# Altium PCB PCB1.PcbDoc (part 1 of 9)
Units mm, origin at the board's own origin, x right, y up, seen from the top; angles counter-clockwise.
Board outline 227 x 102 mm, 4 copper layers (Top Layer, MidLayer1, MidLayer2, Bottom Layer); 425 components, 426 nets, 1455 pads, 440 vias.
Unrouted connection lines stored in the file: 2.
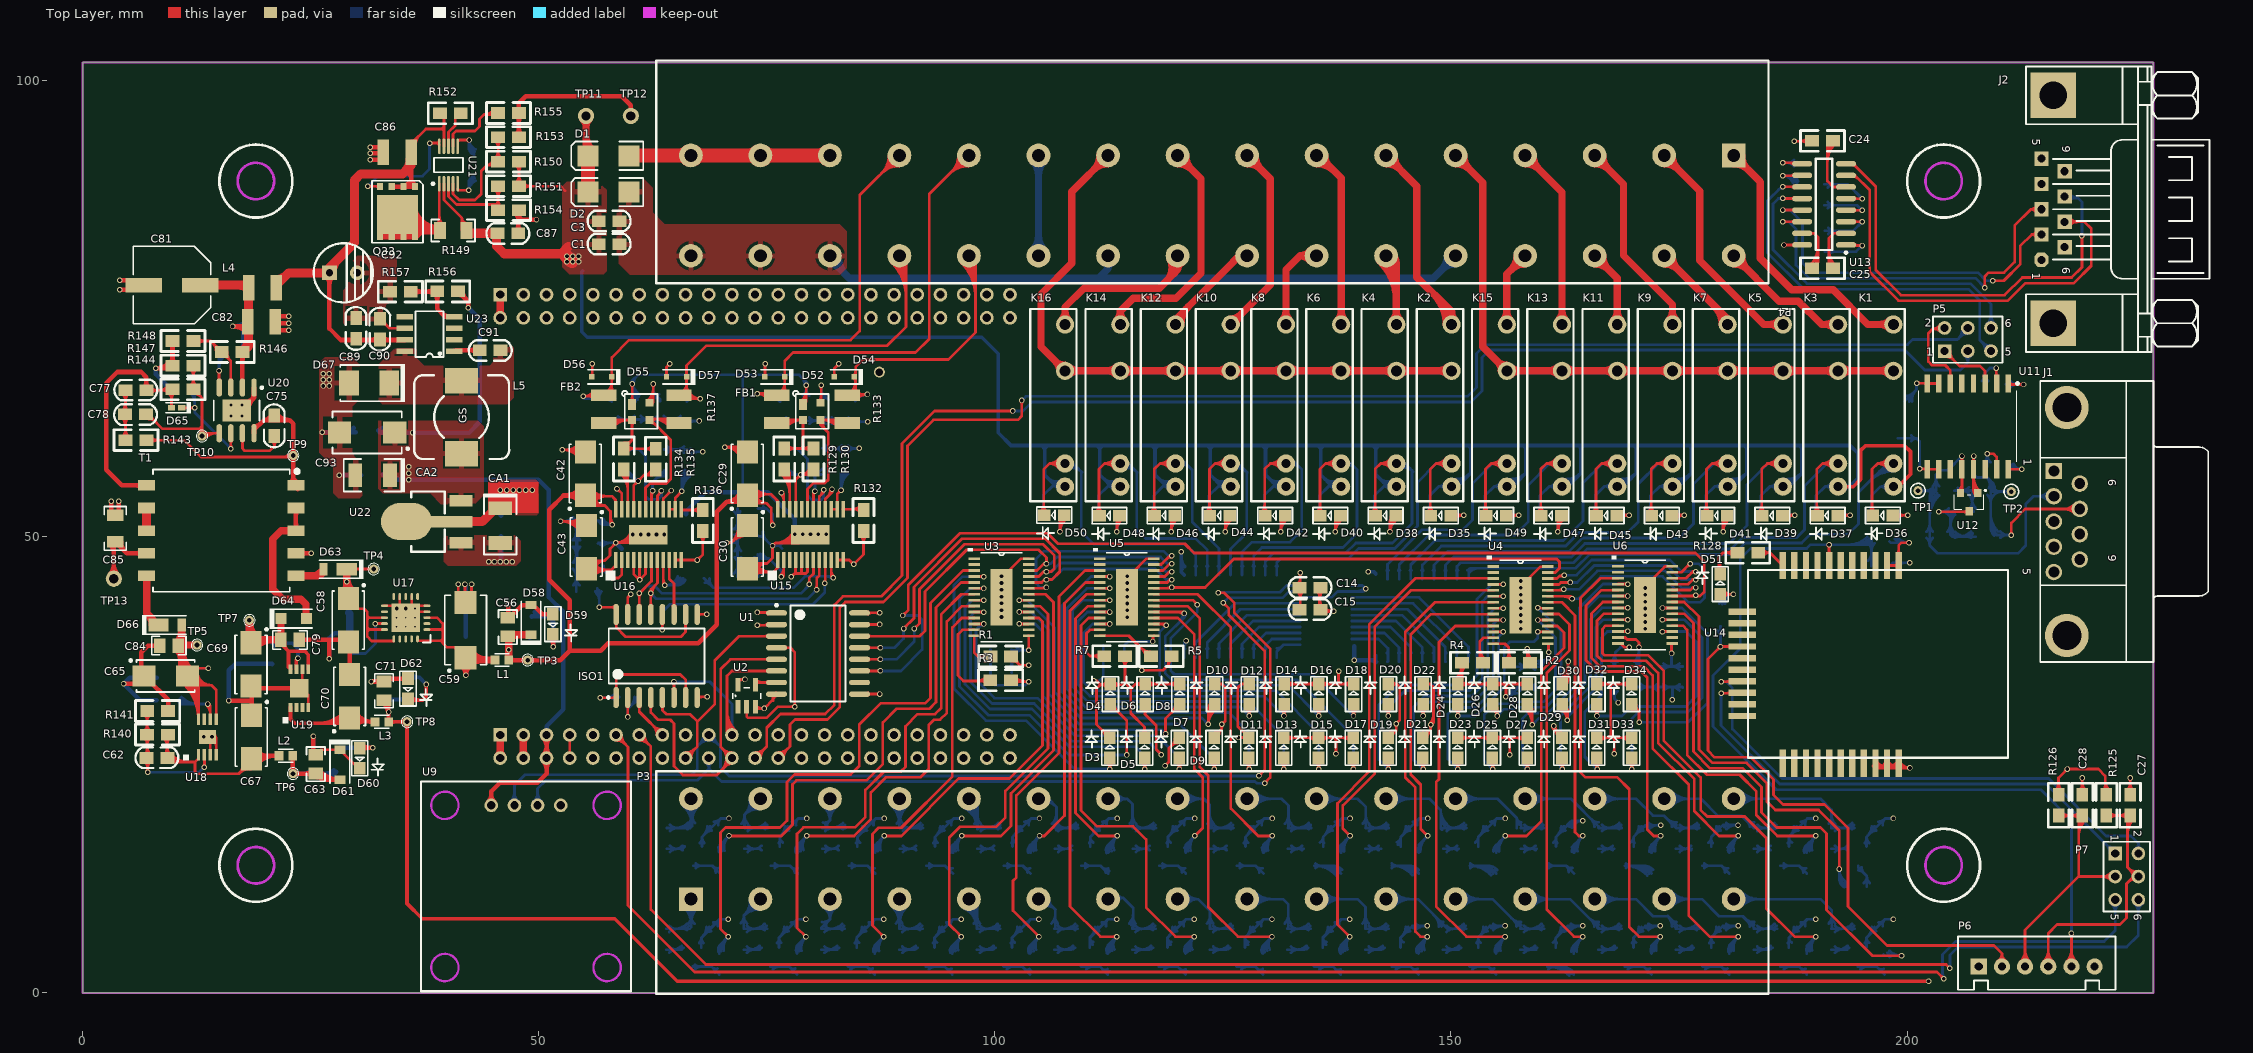
[diagram p0: Top Layer view]
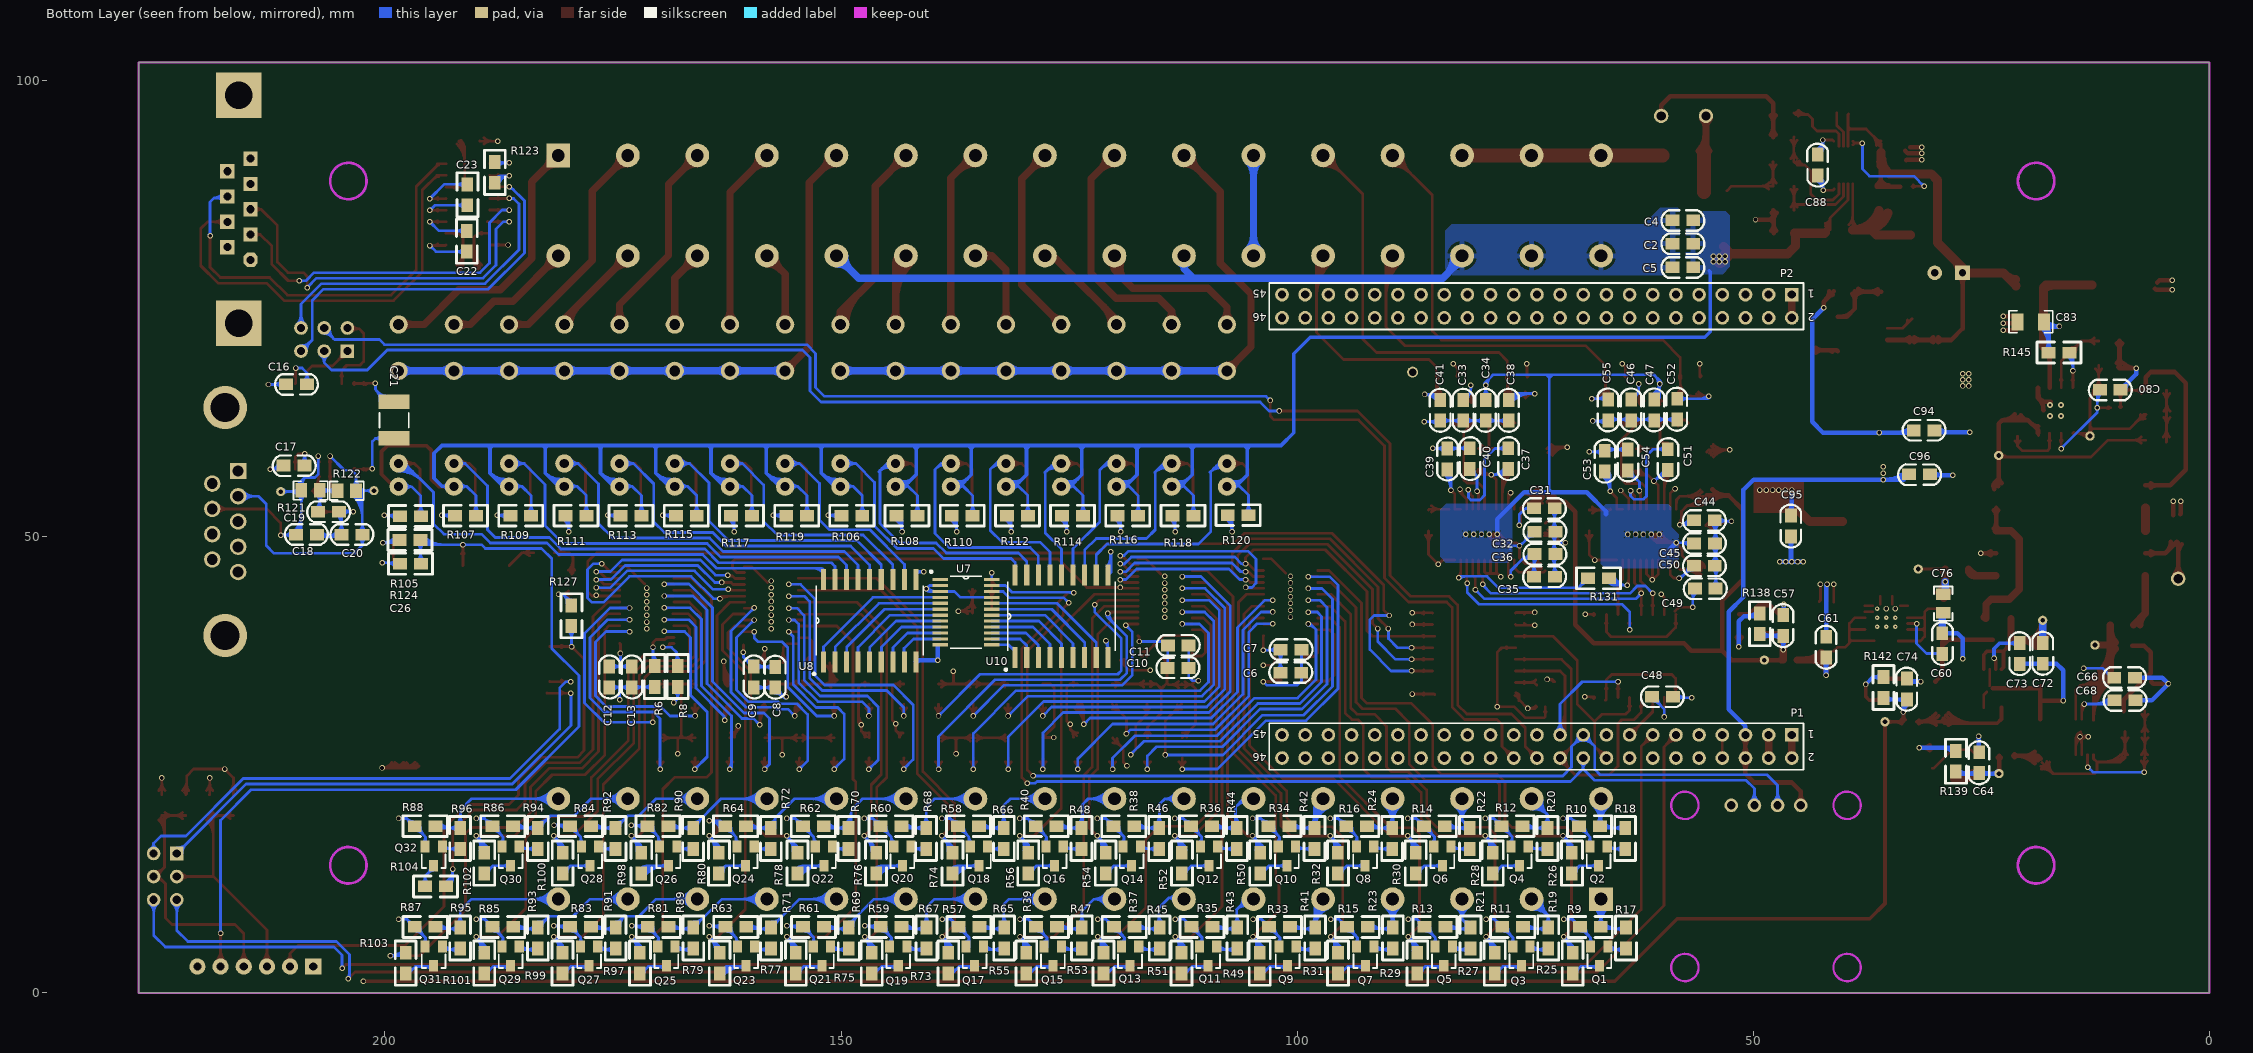
[diagram p1: Bottom Layer view, seen from below]
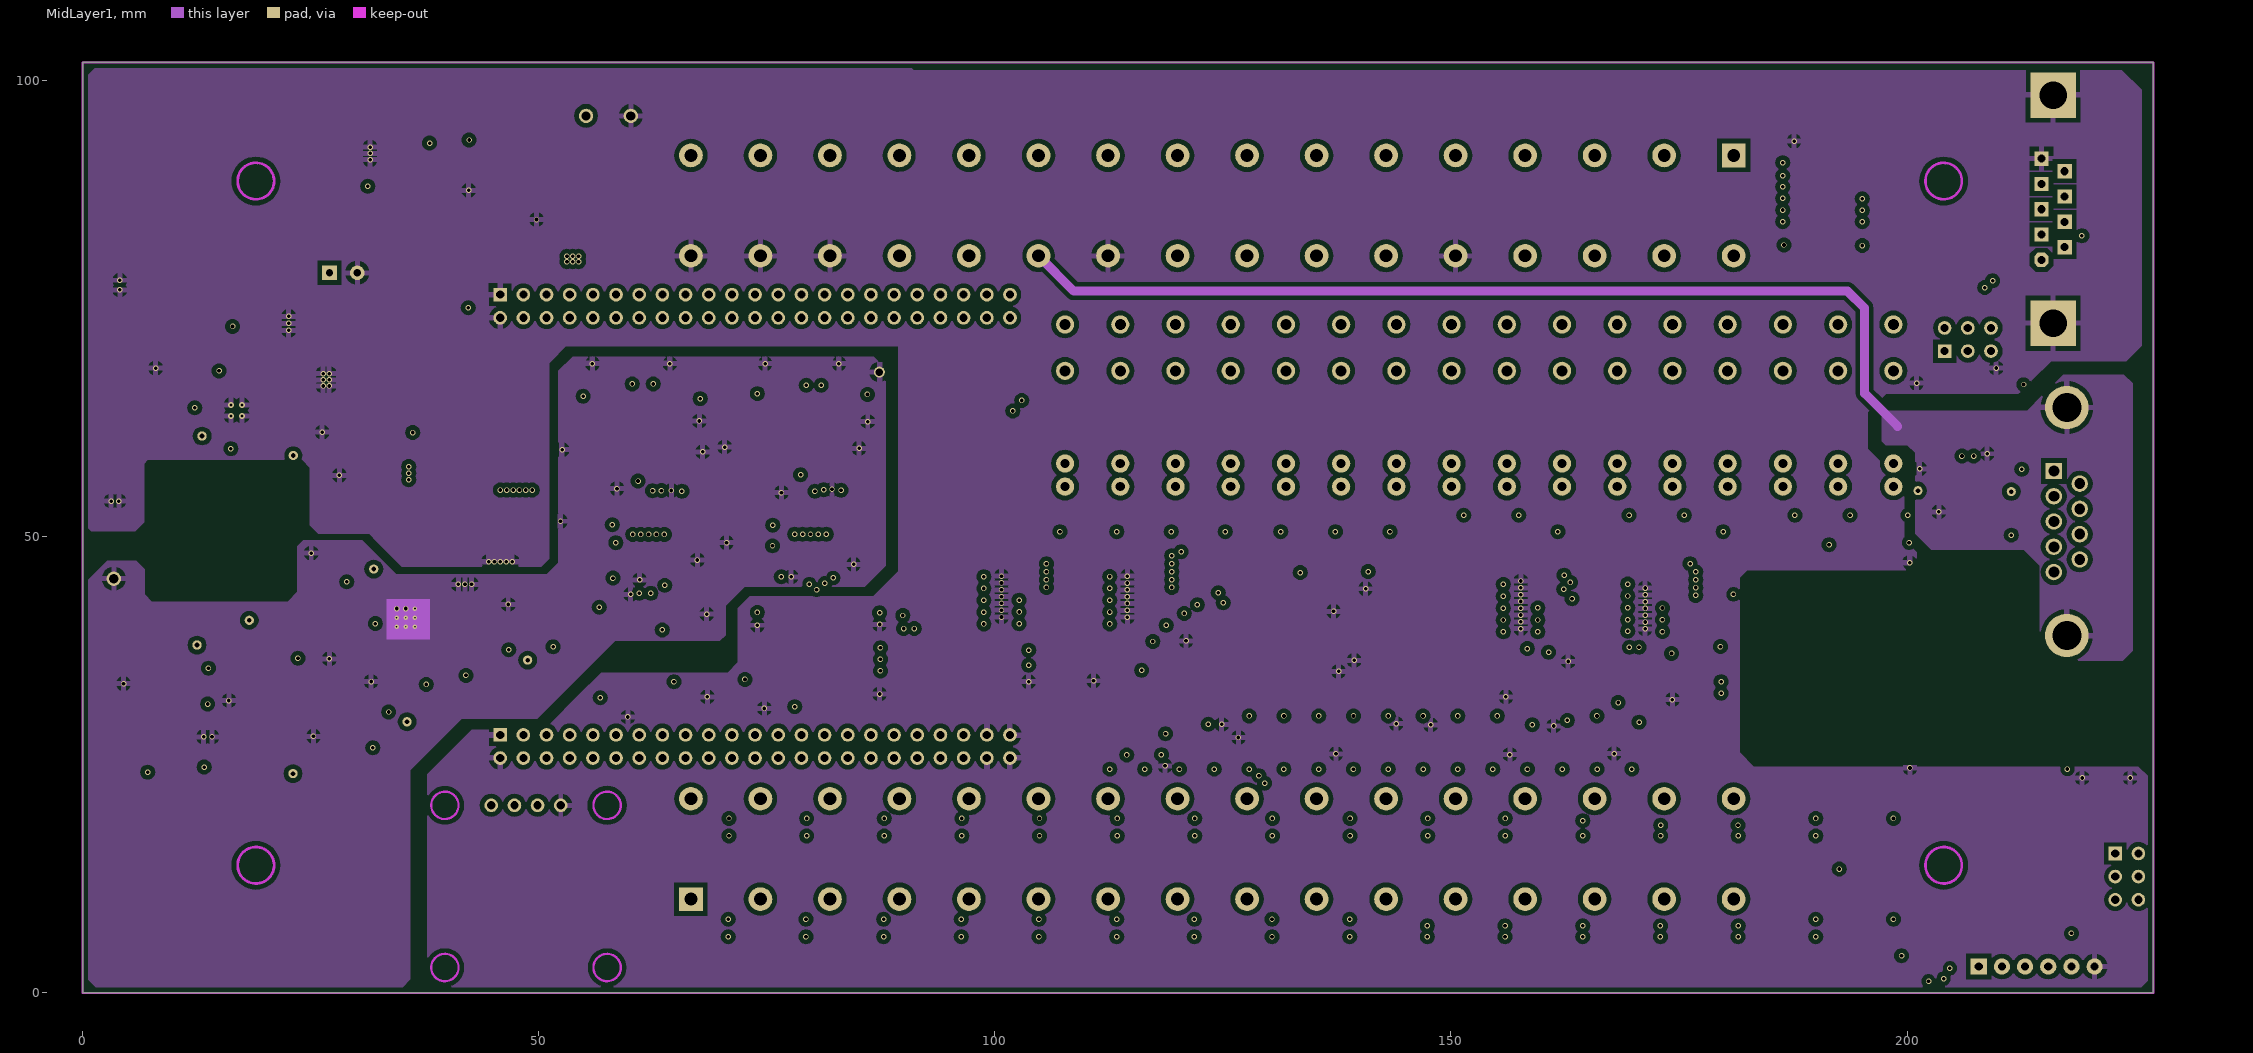
[diagram p2: MidLayer1]
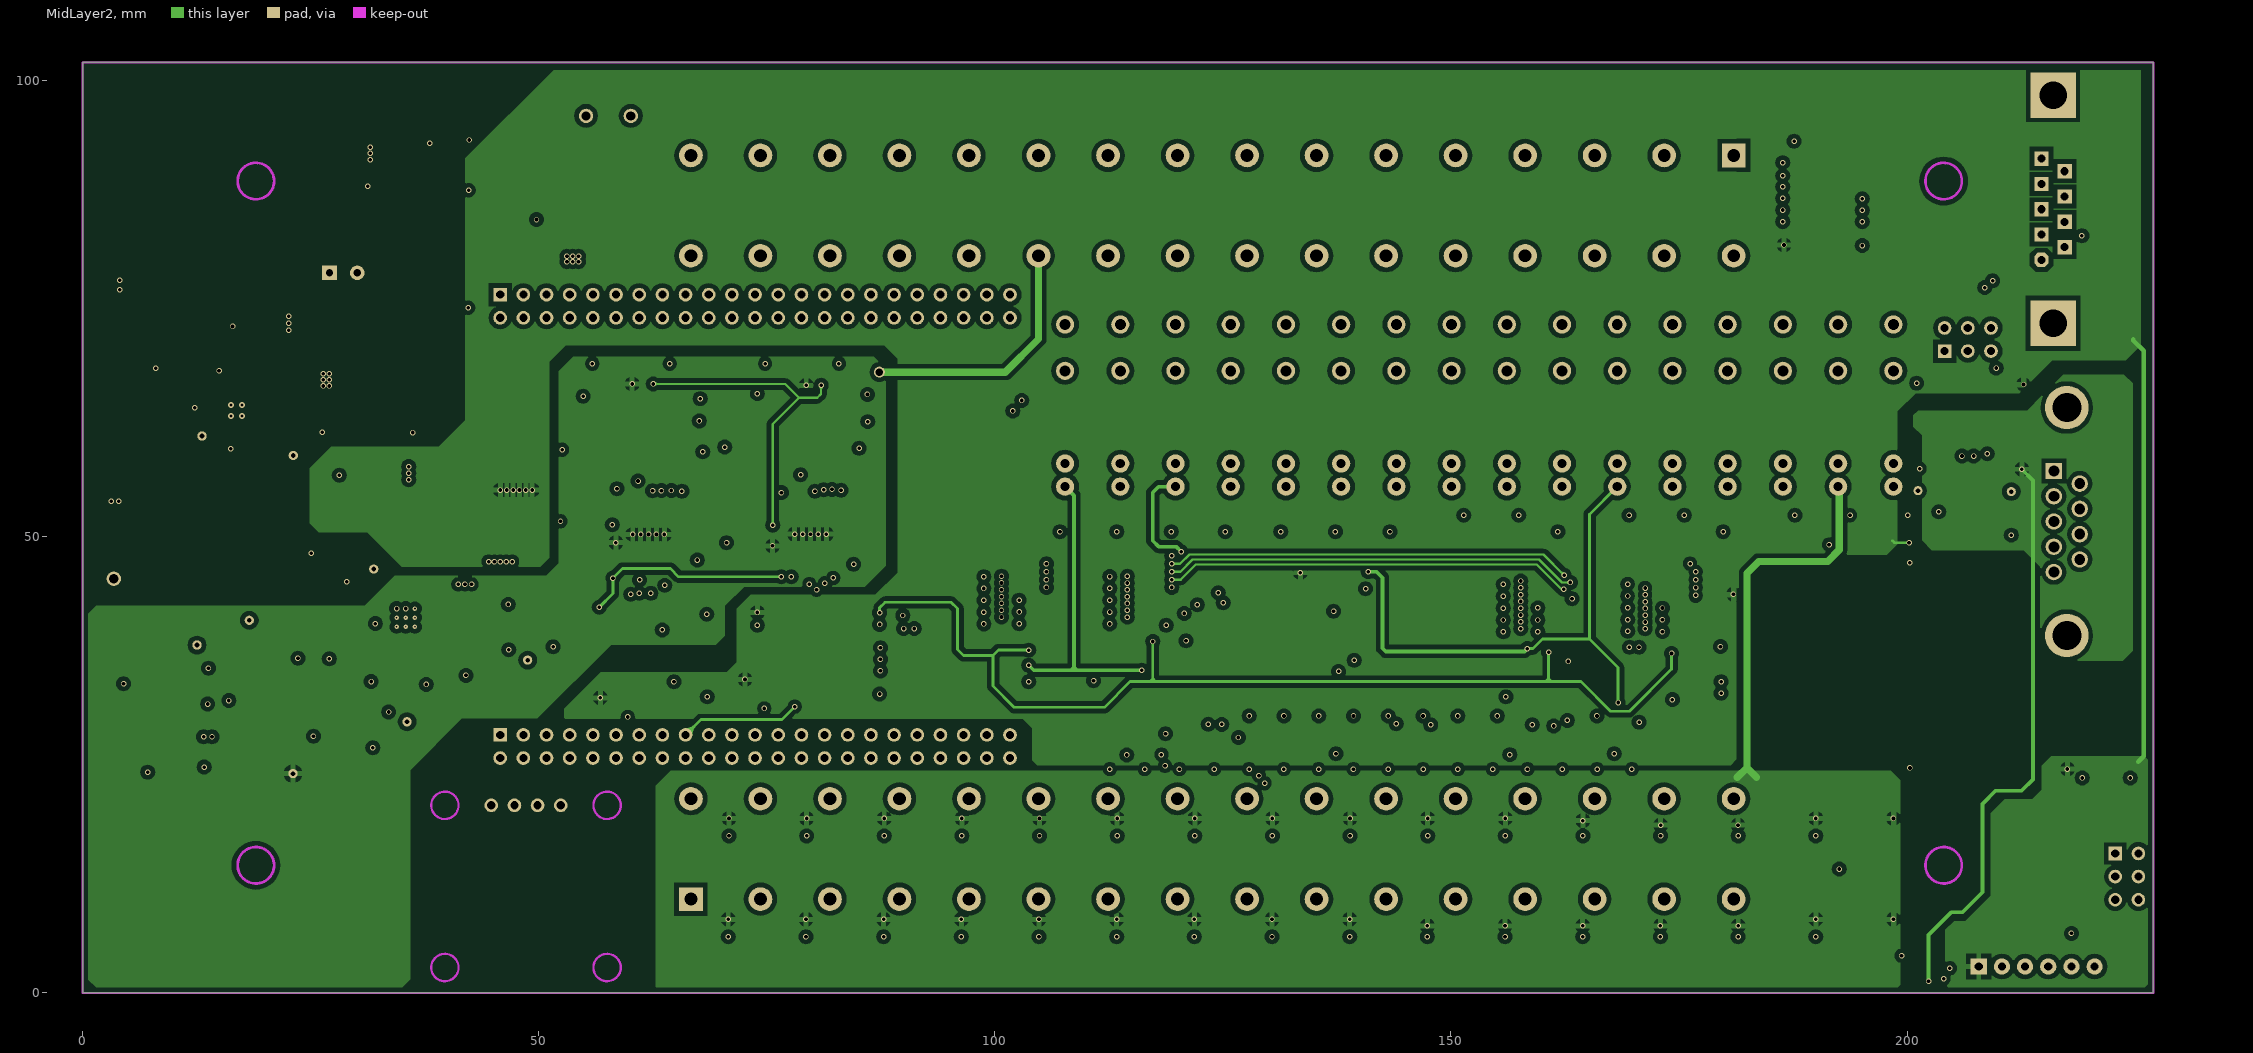
[diagram p3: MidLayer2]

## Layer stack, top to bottom
Top Layer: signal copper 0.0356
Dielectric: core 0.32, FR-4, Dk 4.8
MidLayer1: signal copper 0.0356
Dielectric: prepreg 0.32, FR-4, Dk 4.8
MidLayer2: signal copper 0.0356
Dielectric: core 0.32, FR-4, Dk 4.8
Bottom Layer: signal copper 0.0356

## Board outline
0,0 227,0 227,102 0,102

## Design rules (kind name [scope] priority, off if disabled: settings)
Clearance [All] p1: gap=0.3
ComponentClearance [All] p1: gap=0.254 collisioncheckmode=3 verticalgap=0.254
PolygonConnect [All] p1: connectstyle=Relief reliefconductorwidth=0.6 reliefentries=4 polygonreliefangle="90 Angle"
RoutingVias [All] p1: holewidth=0.711 width=1.27 viastyle="Through Hole" minholewidth=0.711 minwidth=1.27 maxholewidth=0.711 maxwidth=1.27
SolderMaskExpansion [All] p1: expansion=0.102
TestPointUsage FabricationTestPointUsage [All] p1: valid=0 allowmultiple=FALSE
Testpoint FabricationTestpoint [All] p1: side=3 testpointundercomponent=TRUE minsize=1.016 maxsize=2.54 preferedsize=1.524 minholesize=0 maxholesize=1.016 preferedholesize=0.813 testpointgrid=0.025 style=297 order=0123456789
Width [All] p1: maxlimit=2 minlimit=0.254 preferedwidth=0.254 toplayer_prefwidth=0.3 midlayer1_prefwidth=0.3 midlayer2_prefwidth=0.3 bottomlayer_prefwidth=0.3 minimp=50.000000 maximp=50.000000 favimp=50.000000
18 further rules are at their usual default settings.

## Classes and differential pairs
component class Designator: C75 C76 C77 C78 C79 C80 C81 C82 C83 C84 C85 C86 C87 C88 C89 C90 C91 C92 C93 C94 C95 C96 CA1 CA2 D63 D64 D65 D66 D67 L4 L5 Q33 R143 R144 R145 R146 R147 R148 R149 R150 R151 R152 R153 R154 R155 R156 R157 T1 TP9 TP10 TP11 TP12 TP13 TP19 U20 U21 U22 U23
component class Designator: C56 C57 C58 C59 C60 C61 C62 C63 C64 C65 C66 C67 C68 C69 C70 C71 C72 C73 C74 D58 D59 D60 D61 D62 L1 L2 L3 R138 R139 R140 R141 R142 TP3 TP4 TP5 TP6 TP7 TP8 TP16 TP21 TP28 U17 U18 U19
component class Designator: C29 C30 C31 C32 C33 C34 C35 C36 C37 C38 C39 C40 C41 C42 C43 C44 C45 C46 C47 C48 C49 C50 C51 C52 C53 C54 C55 D52 D53 D54 D55 D56 D57 FB1 FB2 FB3 H1 H2 H3 H4 ISO1 J3 J4 J5 J6 J8 R129 R130 R131 R132 R133 R134 R135 R136 R137 Rset2 U15 U16
component class Designator: P1 P2 P3 P4
component class Designator: C1 C2 C3 C4 C5 C6 C7 C8 C9 C10 C11 C12 C13 D1 D2 D3 D4 D5 D6 D7 D8 D9 D10 D11 D12 D13 D14 D15 D16 D17 D18 D19 D20 D21 D22 D23 D24 D25 D26 D27 D28 D29 D30 D31 D32 D33 D34 R1 R2 R3 R4 R5 R6 R7 R8 U1 U2 U3 U4 U5 U6
component class Designator: Q1 Q2 Q3 Q4 Q5 Q6 Q7 Q8 Q9 Q10 Q11 Q12 Q13 Q14 Q15 Q16 Q17 Q18 Q19 Q20 Q21 Q22 Q23 Q24 Q25 Q26 Q27 Q28 Q29 Q30 Q31 Q32 R9 R10 R11 R12 R13 R14 R15 R16 R17 R18 R19 R20 R21 R22 R23 R24 R25 R26 R27 R28 R29 R30 R31 R32 R33 R34 R35 R36 R37 R38 R39 R40 R41 R42 R43 R44 R45 R46 R47 R48 R49 R50 R51 R52 R53 R54 R55 R56 R57 R58 R59 R60 R61 R62 R63 R64 R65 R66 R67 R68 R69 R70 R71 R72 R73 R74 R75 R76 R77 R78 R79 R80 R81 R82 R83 R84 R85 R86 R87 R88 R89 R90 R91 R92 R93 R94 R95 R96 R97 R98 R99 R100 R101 R102 R103 R104
component class Designator: C14 C15 D35 D36 D37 D38 D39 D40 D41 D42 D43 D44 D45 D46 D47 D48 D49 D50 K1 K2 K3 K4 K5 K6 K7 K8 K9 K10 K11 K12 K13 K14 K15 K16 R105 R106 R107 R108 R109 R110 R111 R112 R113 R114 R115 R116 R117 R118 R119 R120 U7 U8 U9 U10
component class Designator: C16 C17 C18 C19 C20 C21 C22 C23 C24 C25 C26 C27 C28 D51 J1 J2 P5 P6 P7 R121 R122 R123 R124 R125 R126 R127 R128 TP1 TP2 U11 U12 U13
net class PA[0..7]: PA0 PA1 PA2 PA3 PA4 PA5 PA6 PA7
net class PB[0..7]: PB0 PB1 PB2 PB3 PB4 PB5 PB6 PB7

## Components (designator, comment, footprint, x,y, rotation, side; value= is the part's Value field where it differs from the comment)
C1 "Cap" 0805_cap 58.56,81.95 r180 top
C2 "Cap" 0805_cap 58.56,82.26 r180 bottom
C3 "Cap" 0805_cap 58.56,84.48 r180 top
C4 "Cap" 0805_cap 58.56,84.8 r180 bottom
C5 "Cap" 0805_cap 58.56,79.66 r180 bottom
C6 "Cap" 0805_cap 99.86,35.01 r0 bottom
C7 "Cap" 0805_cap 99.83,37.52 r0 bottom
C8 "Cap" 0805_cap 157.337,33.777 r90 bottom
C9 "Cap" 0805_cap 159.66,33.8 r90 bottom
C10 "Cap" 0805_cap 112.234,35.51 r0 bottom
C11 "Cap" 0805_cap 112.204,37.98 r0 bottom
C12 "Cap" 0805_cap 175.507,33.8 r90 bottom
C13 "Cap" 0805_cap 173.057,33.8 r90 bottom
C14 "Cap" 0805_cap 135.39,44.31 r180 top
C15 "Cap" 0805_cap 135.39,41.91 r180 top
C16 "C1005X7R1C103K" 0805_cap 210.53,66.85 r180 bottom
C17 "C1005X7R1C103K" 0805_cap 210.78,57.93 r180 bottom
C18 "06035A680JAT2A" 0805_cap 207.77,50.13 r0 bottom
C19 "C1608C0G1E472J" 0805_cap 207,52.88 r180 bottom
C20 "06035A680JAT2A" 0805_cap 202.78,50.12 r0 bottom
C21 "1812GC102KA1" 1812 198.99,62.8 r90 bottom
C22 "0.1uF" C0805 191.01,83.8 r90 bottom
C23 "0.1uF" C0805 190.95,88.89 r90 bottom
C24 "0.1uF" C0805 192.134,93.4 r0 top
C25 "0.1uF" C0805 189.34,79.44 r180 top
C26 "0.1uF" C0805 195.8,47.05 r180 bottom
C27 "101" C0805 224.45,19.19 r270 top
C28 "101" C0805 219.217,19.19 r270 top
C29 "293D475X9035C2TE3" 6032-28 72.87,56.93 r90 top
C30 "293D475X9035C2TE3" 6032-28 72.88,48.881 r270 top
C31 "GRM188R71H104KA93D" 0805_cap 73.74,53.23 r180 bottom
C32 "GRM188R71H104KA93D" 0805_cap 72,50.46 r0 bottom
C33 "GRM188R71H104KA93D" 0805_cap 81.67,64.71 r270 bottom
C34 "GRM188R71H104KA93D" 0805_cap 79.21,64.71 r270 bottom
C35 "GRM188R71H104KA93D" 0805_cap 73.72,45.75 r180 bottom
C36 "GRM188R71H104KA93D" 0805_cap 73.68,48.228 r180 bottom
C37 "GRM1885C1H222JA01D" 0805_cap 76.97,57.74 r90 bottom
C38 "06035C104KAT2A" 0805_cap 76.69,64.71 r270 bottom
C39 "06035C104KAT2A" 0805_cap 83.67,57.69 r90 bottom
C40 "C1608X7R1H223K" 0805_cap 81.18,57.74 r90 bottom
C41 "06035C104KAT2A" 0805_cap 84.19,64.71 r270 bottom
C42 "293D475X9035C2TE3" 6032-28 55.11,56.93 r90 top
C43 "293D475X9035C2TE3" 6032-28 55.22,48.881 r270 top
C44 "GRM188R71H104KA93D" 0805_cap 56.2,51.91 r180 bottom
C45 "GRM188R71H104KA93D" 0805_cap 54.52,49.16 r0 bottom
C46 "GRM188R71H104KA93D" 0805_cap 63.265,64.75 r270 bottom
C47 "GRM188R71H104KA93D" 0805_cap 60.74,64.75 r270 bottom
C48 "GRM188R71H104KA93D" 0805_cap 59.13,32.34 r0 bottom
C49 "GRM188R71H104KA93D" 0805_cap 56.1,44.45 r180 bottom
C50 "GRM188R71H104KA93D" 0805_cap 56.2,46.95 r180 bottom
C51 "GRM1885C1H222JA01D" 0805_cap 59.48,57.63 r90 bottom
C52 "06035C104KAT2A" 0805_cap 58.25,64.83 r270 bottom
C53 "06035C104KAT2A" 0805_cap 66.39,57.46 r90 bottom
C54 "C1608X7R1H223K" 0805_cap 63.88,57.59 r90 bottom
C55 "06035C104KAT2A" 0805_cap 65.79,64.75 r270 bottom
C56 "C2012X5R1H475K125AB" 0805_HV 46.61,40.1 r90 top
C57 "06035C104KAT2A" 0805_cap 46.61,41.116 r270 bottom
C58 "293D475X9035C2TE3" 6032-28 29.13,40.86 r270 top
C59 "293D226X9035D2TE3" 7343-31 41.985,39.78 r90 top
C60 "C1608X7R1E105K080AB" 0805_cap 29.39,37.46 r90 bottom
C61 "06035C104KAT2A" 0805_cap 41.9,38.74 r270 bottom
C62 "06031C103JAT2A" 0805_cap 8.99,25.65 r180 top
C63 "C2012X5R1H475K125AB" 0805_HV 25.565,25.08 r270 top
C64 "06035C104KAT2A" 0805_cap 25.13,26.08 r270 bottom
C65 "293D106X9035C2TE3" 6032-28 9.12,34.745 r0 top
C66 "06035C104KAT2A" 0805_cap 8.46,34.45 r0 bottom
C67 "293D106X9035C2TE3" 6032-28 18.51,28.06 r270 top
C68 "06031C103JAT2A" 0805_cap 10.08,32.2 r180 bottom
C69 "293D106X9035C2TE3" 6032-28 18.465,36.02 r270 top
C70 "293D106X9035C2TE3" 6032-28 29.27,32.526 r90 top
C71 "C2012X5R1H475K125AB" 0805_HV 33.04,33.126 r90 top
C72 "06035C104KAT2A" 0805_cap 18.4,36.4 r90 bottom
C73 "06031C102JAT2A" 0805_cap 20.67,38.04 r270 bottom
C74 "06035C104KAT2A" 0805_cap 33.04,34.142 r270 bottom
C75 "06031C103JAT2A" 0805_cap 21.14,63.01 r270 top
C76 "GRM219R61E225KA12D" 0805_HV 29.18,42.68 r270 bottom
C77 "06031C103JAT2A" 0805_cap 6.68,65.95 r180 top
C78 "06031C102JAT2A" 0805_CAP 4.97,63.53 r0 top
C79 "GRM219R61E225KA12D" 0805_HV 22.75,38.71 r0 top
C80 "C1608X7R1E105K080AB" 0805_cap 11.71,66.24 r180 bottom
C81 "EEE-FK1H220P" SM_RADIAL_E 9.79,77.59 r180 top
C82 "GRM32ER72A225KA35L" 1210 19.62,73.583 r180 top
C83 "C3216X7R2A474K" 1206 19.58,73.57 r0 bottom
C84 "GRM219R61E225KA12D" 0805_HV 9.46,38.08 r0 top
C85 "202R18W102KV4E" 1206 3.58,50.92 r270 top
C86 "GRM32ER72A225KA35L" 1210 34.49,92.14 r0 top
C87 "06031C102JAT2A" 0805_cap 45.784,83.39 r0 top
C88 "UMK107ABJ474KA-T" 0805_cap 42.814,91.59 r270 bottom
C89 "4.7μF/10%/0805" 0805_CAP 30.11,73.686 r270 top
C90 "4.7μF/10%/0805" 0805_CAP 32.72,73.596 r270 top
C91 "0.01μF/10%/0805" 0805_CAP 43.85,70.57 r0 top
C92 "220μF" CZ3.0/6.5 28.59,78.94 r180 top
C93 "476C" 7343-43 31.2,61.44 r180 top
C94 "0.1μf/10%/0805" 0805_CAP 30.44,61.55 r0 bottom
C95 "0.1uF" 0805_CAP 45.76,52.02 r270 bottom
C96 "0.1uF" 0805_CAP 32.62,56.95 r180 bottom
CA1 "4.7UF/16V" 3528cap 45.76,53.11 r270 top
CA2 "10UF/16V" 3528cap 33.68,56.78 r180 top
D1 "B540C-13-F" SMB#1 57.66,91.77 r180 top
D2 "SMCJ26CA" SMB#1 57.66,87.79 r180 top
D3 "LED3" 0805LED 112.614,26.903 r90 top
D4 "LED3" 0805LED 112.673,32.803 r90 top
D5 "LED3" 0805LED 116.427,26.903 r90 top
D6 "LED3" 0805LED 116.482,32.803 r90 top
D7 "LED3" 0805LED 120.24,26.903 r90 top
D8 "LED3" 0805LED 120.291,32.803 r90 top
D9 "LED3" 0805LED 124.052,26.903 r90 top
D10 "LED3" 0805LED 124.1,32.803 r90 top
D11 "LED3" 0805LED 127.865,26.903 r90 top
D12 "LED3" 0805LED 127.91,32.803 r90 top
D13 "LED3" 0805LED 131.678,26.903 r90 top
D14 "LED3" 0805LED 131.719,32.803 r90 top
D15 "LED3" 0805LED 135.491,26.903 r90 top
D16 "LED3" 0805LED 135.528,32.803 r90 top
D17 "LED3" 0805LED 139.304,26.903 r90 top
D18 "LED3" 0805LED 139.337,32.803 r90 top
D19 "LED3" 0805LED 143.116,26.903 r90 top
D20 "LED3" 0805LED 143.146,32.803 r90 top
D21 "LED3" 0805LED 146.929,26.903 r90 top
D22 "LED3" 0805LED 146.955,32.803 r90 top
D23 "LED3" 0805LED 150.742,26.903 r90 top
D24 "LED3" 0805LED 150.765,32.803 r90 top
D25 "LED3" 0805LED 154.555,26.903 r90 top
D26 "LED3" 0805LED 154.574,32.803 r90 top
D27 "LED3" 0805LED 158.368,26.903 r90 top
D28 "LED3" 0805LED 158.383,32.803 r90 top
D29 "LED3" 0805LED 162.181,26.903 r90 top
D30 "LED3" 0805LED 162.192,32.803 r90 top
D31 "LED3" 0805LED 165.993,26.903 r90 top
D32 "LED3" 0805LED 166.001,32.803 r90 top
D33 "LED3" 0805LED 169.806,26.903 r90 top
D34 "LED3" 0805LED 169.81,32.803 r90 top
D35 "LED3" 0805LED 148.857,52.34 r180 top
D36 "LED3" 0805LED 197.3,52.35 r180 top
D37 "LED3" 0805LED 191.245,52.34 r180 top
D38 "LED3" 0805LED 142.802,52.34 r180 top
D39 "LED3" 0805LED 185.189,52.34 r180 top
D40 "LED3" 0805LED 136.747,52.34 r180 top
D41 "LED3" 0805LED 179.134,52.34 r180 top
D42 "LED3" 0805LED 130.691,52.34 r180 top
D43 "LED3" 0805LED 173.079,52.34 r180 top
D44 "LED3" 0805LED 124.636,52.34 r180 top
D45 "LED3" 0805LED 167.023,52.34 r180 top
D46 "LED3" 0805LED 118.581,52.34 r180 top
D47 "LED3" 0805LED 160.968,52.34 r180 top
D48 "LED3" 0805LED 112.525,52.34 r180 top
D49 "LED3" 0805LED 154.913,52.34 r180 top
D50 "LED3" 0805LED 106.47,52.39 r180 top
D51 "VDD33" 0805LED 179.53,44.86 r90 top
D52 "CD143A-SR70" SOT-143 78.98,64.7 r0 top
D53 "CDSOD323-T15SC" sod-323 75.87,67.53 r180 top
D54 "CDSOD323-T15SC" sod-323 83.51,67.53 r180 top
D55 "CD143A-SR70" SOT-143 60.24,64.7 r0 top
D56 "CDSOD323-T15SC" sod-323 56.92,67.53 r180 top
D57 "CDSOD323-T15SC" sod-323 65.11,67.53 r180 top
D58 "DZ2W18000L" SOD-123 49.16,40.9 r90 top
D59 "LED_LG L29K-G2J1-24-Z" 0805LED 51.54,40.39 r270 top
D60 "DZ2W18000L" SOD-123 28.21,25.02 r270 top
D61 "LED_LG L29K-G2J1-24-Z" 0805LED 30.37,25.69 r270 top
D62 "LED_LG L29K-G2J1-24-Z" 0805LED 35.66,33.32 r270 top
D63 "DFLS1200-7" powerDI123 27.69,46.45 r180 top
D64 "PMEG6010CEH,115" SOD-123F 23.15,41.04 r0 top
D65 "SDM10U45-7-F" SOD-523 10.31,64.15 r180 top
D66 "DFLS1200-7" powerDI123 9.6,40.33 r0 top
D67 "SMB" SMB#2 31.42,66.84 r180 top
FB1 "MH3261-501Y" 1210 76.11,64 r270 top
FB2 "MH3261-501Y" 1210 57.12,64 r270 top
ISO1 "ISO7641FCDW" M16B_N 62.93,36.94 r90 top locked
J1 "1734348-1" CONN_1734348-1 227,51.68 r270 top locked
J2 "UART-male" "UART - Male" 220.04,85.91 r270 top locked
K1 "Relay-SPST" PA1a-24v 194.67,53.89 r90 top
K2 "Relay-SPST" PA1a-24v 146.249,53.89 r90 top
K3 "Relay-SPST" PA1a-24v 188.617,53.89 r90 top
K4 "Relay-SPST" PA1a-24v 140.196,53.89 r90 top
K5 "Relay-SPST" PA1a-24v 182.565,53.89 r90 top
K6 "Relay-SPST" PA1a-24v 134.143,53.89 r90 top
K7 "Relay-SPST" PA1a-24v 176.512,53.89 r90 top
K8 "Relay-SPST" PA1a-24v 128.091,53.89 r90 top
K9 "Relay-SPST" PA1a-24v 170.459,53.89 r90 top
K10 "Relay-SPST" PA1a-24v 122.038,53.89 r90 top
K11 "Relay-SPST" PA1a-24v 164.407,53.89 r90 top
K12 "Relay-SPST" PA1a-24v 115.985,53.89 r90 top
K13 "Relay-SPST" PA1a-24v 158.354,53.89 r90 top
K14 "Relay-SPST" PA1a-24v 109.933,53.89 r90 top
K15 "Relay-SPST" PA1a-24v 152.301,53.89 r90 top
K16 "Relay-SPST" PA1a-24v 103.88,53.89 r90 top
L1 "1000 OHM" FB0603 45.97,36.5 r0 top
L2 "1000 OHM" FB0603 22.28,26 r0 top
L3 "1000 OHM" FB0603 32.8,29.716 r0 top
L4 "3.3uH" 1210 19.73,77.3 r0 top
L5 "15μH" GSDS104C2 41.55,63.13 r0 top
P1 "Header 23X2" HDR2X23 45.78,28.29 r0 bottom locked
P2 "Header 23X2" HDR2X23 45.78,76.55 r0 bottom locked
P3 "Header 16X2" 123 66.687,10.29 r90 top locked
P4 "Header 16X2" 123 180.987,91.81 r270 top locked
P5 "Header 3X2" HDR2X3 204.11,70.36 r0 top
P6 "ISP" SIP-6B 207.85,2.9 r0 top
P7 "Header 3X2" HDR2X3 222.81,15.3 r270 top
Q1 "8550" Sot23-3 65.93,5.087 r0 bottom
Q2 "8550" Sot23-3 66.01,16.047 r0 bottom
Q3 "8550" Sot23-3 74.47,5.087 r0 bottom
Q4 "8550" Sot23-3 74.67,16.047 r0 bottom
Q5 "8550" Sot23-3 82.98,5.087 r0 bottom
Q6 "8550" Sot23-3 83.13,16.047 r0 bottom
Q7 "8550" Sot23-3 91.58,5.087 r0 bottom
Q8 "8550" Sot23-3 91.6,16.047 r0 bottom
Q9 "8550" Sot23-3 100.1,5.087 r0 bottom
Q10 "8550" Sot23-3 100.18,16.047 r0 bottom
Q11 "8550" Sot23-3 108.81,5.087 r0 bottom
Q12 "8550" Sot23-3 108.7,16.047 r0 bottom
Q13 "8550" Sot23-3 117.37,5.087 r0 bottom
Q14 "8550" Sot23-3 117.19,16.047 r0 bottom
Q15 "8550" Sot23-3 125.83,5.087 r0 bottom
Q16 "8550" Sot23-3 125.64,16.047 r0 bottom
Q17 "8550" Sot23-3 134.4,5.087 r0 bottom
Q18 "8550" Sot23-3 133.94,16.047 r0 bottom
Q19 "8550" Sot23-3 142.78,5.087 r0 bottom
Q20 "8550" Sot23-3 142.32,16.047 r0 bottom
Q21 "8550" Sot23-3 151.15,5.087 r0 bottom
Q22 "8550" Sot23-3 150.92,16.047 r0 bottom
Q23 "8550" Sot23-3 159.46,5.087 r0 bottom
Q24 "8550" Sot23-3 159.51,16.047 r0 bottom
Q25 "8550" Sot23-3 168.19,5.087 r0 bottom
Q26 "8550" Sot23-3 167.98,16.047 r0 bottom
Q27 "8550" Sot23-3 176.66,5.087 r0 bottom
Q28 "8550" Sot23-3 176.56,16.047 r0 bottom
Q29 "8550" Sot23-3 185.27,5.087 r0 bottom
Q30 "8550" Sot23-3 185.27,16.047 r0 bottom
Q31 "8550" Sot23-3 193.7,5.087 r0 bottom
Q32 "8550" Sot23-3 193.7,16.047 r0 bottom
Q33 "CSD18537NQ5A" TRANS_NexFET_Q5A 34.53,85.62 r270 top
R1 "Res1" 0805 101.79,36.88 r180 top
R2 "Res1" 0805 158.65,36.2 r180 top
R3 "Res1" 0805 101.78,34.28 r180 top
R4 "Res1" 0805 151.23,36.2 r0 top
R5 "Res1" 0805 119.39,36.93 r180 top
R6 "Res1" 0805 167.9,33.551 r90 bottom
R7 "Res1" 0805 114.28,36.92 r180 top
R8 "Res1" 0805 170.431,33.551 r90 bottom
R9 "Res1" 0805 69.01,7.24 r180 bottom
R10 "Res1" 0805 69.09,18.29 r180 bottom
R11 "Res1" 0805 77.525,7.24 r180 bottom
R12 "Res1" 0805 77.599,18.29 r180 bottom
R13 "Res1" 0805 86.039,7.24 r180 bottom
R14 "Res1" 0805 86.109,18.29 r180 bottom
R15 "Res1" 0805 94.554,7.24 r180 bottom
R16 "Res1" 0805 94.618,18.29 r180 bottom
R17 "Res1" 0805 63.96,7.16 r270 bottom
R18 "Res1" 0805 64.05,18.09 r270 bottom
R19 "Res1" 0805 72.479,7.16 r270 bottom
R20 "Res1" 0805 72.563,18.09 r270 bottom
R21 "Res1" 0805 80.999,7.16 r270 bottom
R22 "Res1" 0805 81.077,18.09 r270 bottom
R23 "Res1" 0805 89.518,7.16 r270 bottom
R24 "Res1" 0805 89.59,18.09 r270 bottom
R25 "Res1" 0805 69.8,2.13 r90 bottom
R26 "Res1" 0805 69.88,13.09 r90 bottom
R27 "Res1" 0805 78.34,2.13 r90 bottom
R28 "Res1" 0805 78.56,13.09 r90 bottom
R29 "Res1" 0805 86.82,2.13 r90 bottom
R30 "Res1" 0805 87,13.09 r90 bottom
R31 "Res1" 0805 95.52,2.13 r90 bottom
R32 "Res1" 0805 95.53,13.09 r90 bottom
R33 "Res1" 0805 103.069,7.24 r180 bottom
R34 "Res1" 0805 103.127,18.29 r180 bottom
R35 "Res1" 0805 111.583,7.24 r180 bottom
R36 "Res1" 0805 111.637,18.29 r180 bottom
R37 "Res1" 0805 120.098,7.24 r180 bottom
R38 "Res1" 0805 120.146,18.29 r180 bottom
R39 "Res1" 0805 128.613,7.24 r180 bottom
R40 "Res1" 0805 128.655,18.29 r180 bottom
R41 "Res1" 0805 98.037,7.16 r270 bottom
R42 "Res1" 0805 98.103,18.09 r270 bottom
R43 "Res1" 0805 106.557,7.16 r270 bottom
R44 "Res1" 0805 106.617,18.09 r270 bottom
R45 "Res1" 0805 115.076,7.16 r270 bottom
R46 "Res1" 0805 115.13,18.09 r270 bottom
R47 "Res1" 0805 123.595,7.16 r270 bottom
R48 "Res1" 0805 123.643,18.09 r270 bottom
R49 "Res1" 0805 104.1,2.13 r90 bottom
R50 "Res1" 0805 104.06,13.09 r90 bottom
R51 "Res1" 0805 112.68,2.13 r90 bottom
R52 "Res1" 0805 112.63,13.09 r90 bottom
R53 "Res1" 0805 121.23,2.13 r90 bottom
R54 "Res1" 0805 121,13.09 r90 bottom
R55 "Res1" 0805 129.69,2.13 r90 bottom
R56 "Res1" 0805 129.48,13.09 r90 bottom
R57 "Res1" 0805 137.127,7.24 r180 bottom
R58 "Res1" 0805 137.165,18.29 r180 bottom
R59 "Res1" 0805 145.642,7.24 r180 bottom
R60 "Res1" 0805 145.674,18.29 r180 bottom
R61 "Res1" 0805 154.157,7.24 r180 bottom
R62 "Res1" 0805 154.183,18.29 r180 bottom
R63 "Res1" 0805 162.671,7.24 r180 bottom
R64 "Res1" 0805 162.693,18.29 r180 bottom
R65 "Res1" 0805 132.115,7.16 r270 bottom
R66 "Res1" 0805 132.157,18.09 r270 bottom
R67 "Res1" 0805 140.634,7.16 r270 bottom
R68 "Res1" 0805 140.67,18.09 r270 bottom
R69 "Res1" 0805 149.153,7.16 r270 bottom
R70 "Res1" 0805 149.183,18.09 r270 bottom
R71 "Res1" 0805 157.673,7.16 r270 bottom
R72 "Res1" 0805 157.697,18.09 r270 bottom
R73 "Res1" 0805 138.23,2.13 r90 bottom
R74 "Res1" 0805 137.78,13.09 r90 bottom
R75 "Res1" 0805 146.63,2.13 r90 bottom
R76 "Res1" 0805 146.16,13.09 r90 bottom
R77 "Res1" 0805 154.95,2.13 r90 bottom
R78 "Res1" 0805 154.77,13.09 r90 bottom
R79 "Res1" 0805 163.3,2.13 r90 bottom
R80 "Res1" 0805 163.38,13.09 r90 bottom
R81 "Res1" 0805 171.186,7.24 r180 bottom
R82 "Res1" 0805 171.202,18.29 r180 bottom
R83 "Res1" 0805 179.701,7.24 r180 bottom
R84 "Res1" 0805 179.711,18.29 r180 bottom
R85 "Res1" 0805 188.215,7.24 r180 bottom
R86 "Res1" 0805 188.221,18.29 r180 bottom
R87 "Res1" 0805 196.73,7.24 r180 bottom
R88 "Res1" 0805 196.73,18.29 r180 bottom
R89 "Res1" 0805 166.192,7.16 r270 bottom
R90 "Res1" 0805 166.21,18.09 r270 bottom
R91 "Res1" 0805 174.711,7.16 r270 bottom
R92 "Res1" 0805 174.723,18.09 r270 bottom
R93 "Res1" 0805 183.231,7.16 r270 bottom
R94 "Res1" 0805 183.237,18.09 r270 bottom
R95 "Res1" 0805 191.75,7.16 r270 bottom
R96 "Res1" 0805 191.75,18.09 r270 bottom
R97 "Res1" 0805 172.04,2.13 r90 bottom
R98 "Res1" 0805 171.88,13.09 r90 bottom
R99 "Res1" 0805 180.53,2.13 r90 bottom
R100 "Res1" 0805 180.51,13.09 r90 bottom
R101 "Res1" 0805 189.11,2.13 r90 bottom
R102 "Res1" 0805 189.11,13.09 r90 bottom
R103 "Res1" 0805 197.72,2.13 r90 bottom
R104 "Res1" 0805 195.58,11.68 r180 bottom
R105 "Res3" 0805 196.06,52.28 r0 bottom
R106 "Res3" 0805 147.669,52.327 r0 bottom
R107 "Res3" 0805 190.011,52.327 r0 bottom
R108 "Res3" 0805 141.62,52.327 r0 bottom
R109 "Res3" 0805 183.962,52.327 r0 bottom
R110 "Res3" 0805 137.857,52.327 r180 bottom
R111 "Res3" 0805 177.913,52.327 r0 bottom
R112 "Res3" 0805 131.809,52.327 r180 bottom
R113 "Res3" 0805 171.865,52.327 r0 bottom
R114 "Res3" 0805 125.76,52.327 r180 bottom
R115 "Res3" 0805 165.816,52.327 r0 bottom
R116 "Res3" 0805 119.711,52.327 r180 bottom
R117 "Res3" 0805 159.767,52.327 r0 bottom
R118 "Res3" 0805 113.662,52.327 r180 bottom
R119 "Res3" 0805 153.718,52.327 r0 bottom
R120 "Res3" 0805 107.613,52.377 r180 bottom
R121 "CRCW080560R4FKEA" 0805_HV 208.14,55.09 r180 bottom
R122 "CRCW080560R4FKEA" 0805_HV 204.18,55.05 r0 bottom
R123 "Res2" 0805 187.94,88.81 r90 bottom
R124 "Res2" 0805 196.1,49.65 r0 bottom
R125 "3.3k" R0805 221.833,19.19 r270 top
R126 "3.3k" R0805 216.6,19.19 r270 top
R127 "Res2" R0805 179.55,42.75 r90 bottom
R128 "620Ω" R0805 181.14,48.26 r180 top
R129 "CRCW060315R0JNEA" 0805 76.92,57.39 r90 top
R130 "CRCW060315R0JNEA" 0805 80.12,57.4 r90 top
R131 "Res3" 0805 65.82,45.46 r0 bottom
R132 "RT0603BRD0715KL" 0805 85.61,50.65 r90 top
R133 "RPC2512JT15R0" 1210 83.81,64 r270 top
R134 "CRCW060315R0JNEA" 0805 59.33,57.4 r90 top
R135 "CRCW060315R0JNEA" 0805 62.84,57.37 r90 top
R136 "RT0603BRD0715KL" 0805 67.99,50.65 r90 top
R137 "RPC2512JT15R0" 1210 65.38,64 r270 top
R138 "CRCW06034K70JNEA" 0805 49.28,39.33 r90 bottom
R139 "CRCW06034K70JNEA" 0805 27.79,24.26 r90 bottom
R140 "CRCW0402110KFKED" 0805 9.37,28.32 r180 top
R141 "TNPW04029K42BEED" 0805 7.09,30.91 r0 top
R142 "CRCW04021K20JNED" 0805 35.73,32.34 r90 bottom
R143 "CRCW060320K0JNEA" 0805 7,60.6 r180 top
R144 "CRCW0603113KFKEA" 0805 9.86,66.17 r0 top
R145 "CRCW0603340KFKEA" 0805 17.63,70.2 r180 bottom
R146 "CRCW0603127KFKEA" 0805 15.26,70.26 r0 top
R147 "RC0603FR-0720KL" 0805 9.86,68.77 r0 top
R148 "RC0603JR-0710KL" 0805 9.86,71.47 r0 top
R149 "PRL1632-R020-F-T1" 1206 40.62,83.58 r180 top
R150 "CRCW060395K3FKEA" 0805 45.554,91.12 r0 top
R151 "CRCW060347K5FKEA" 0805 45.554,88.44 r0 top
R152 "CRCW060310K0FKEA" 0805 39.174,96.43 r0 top
R153 "CRCW06037K50FKEA" 0805 47.834,93.82 r180 top
R154 "CRCW060315K8FKEA" 0805 47.824,85.81 r180 top
R155 "RG1608P-563-B-T5" 0805 47.834,96.46 r180 top
R156 "10K" 0805 38.88,76.9 r0 top
R157 "3.24K/1%/0805" 0805 35.98,76.88 r180 top
T1 "750342178" WURTH_750313995 15.21,50.68 r270 top locked
TP1 "5002" Keystone5002 201.19,55.06 r270 top
TP2 "5002" Keystone5002 211.42,54.96 r270 top
TP3 "TP-038" TP1_PD40_D0.5_S50 48.79,36.49 r90 top
TP4 "TP-038" TP1_PD40_D0.5_S50 31.92,46.47 r90 top
TP5 "TP-038" TP1_PD40_D0.5_S50 12.55,38.14 r0 top
TP6 "TP-038" TP1_PD40_D0.5_S50 23.07,24.05 r0 top
TP7 "TP-038" TP1_PD40_D0.5_S50 18.28,40.85 r90 top
TP8 "TP-038" TP1_PD40_D0.5_S50 35.57,29.73 r90 top
TP9 "TP-038" TP1_PD40_D0.5_S50 23.1,58.92 r0 top
TP10 "TP-038" TP1_PD40_D0.5_S50 13.1,61.05 r0 top
TP11 "TP-040_RND" TP-040_RND 55.19,96.14 r0 top
TP12 "TP-040_RND" TP-040_RND 60.1,96.14 r0 top
TP13 "TP-040_RND" TP-040_RND 3.43,45.41 r0 top
U1 "ISO7641" M16B_N 80.62,37.21 r0 top locked
U2 "SN74LVC1G04_DBV_" DBV5 72.8,32.57 r90 top
U3 "SN65HVS882_PWP_2" PWP28_6P17X2P4 100.73,43.38 r0 top locked
U4 "SN65HVS882_PWP_2" PWP28_6P17X2P4 157.62,42.51 r0 top locked
U5 "SN65HVS882_PWP_2" PWP28_6P17X2P4 114.47,43.38 r0 top locked
U6 "SN65HVS882_PWP_2" PWP28_6P17X2P4 171.28,42.54 r0 top locked
U7 "PCF8575_PW_24" PW24 136.31,41.74 r180 bottom locked
U8 "ULN2803A_DW_18" DW18 146.86,40.82 r90 bottom locked
U9 "MPU6050-MODULE" MPU6050-MODULE 37.11,23.18 r0 top
U10 "ULN2803A_DW_18" DW18 125.83,41.29 r90 bottom locked
U11 "ISO1050DW" ISO1050DW 206.64,62.11 r180 top locked
U12 "NUP2105LT1G" NUP2105LT1G 206.8,53.81 r180 top
U13 "MAX3232E" NSO16_N 190.87,85.96 r90 top
U14 "STM32W108-3" STM32W108-3 182.56,25.79 r0 top locked
U15 "DAC8760IPWP" PWP24-DIE84X166 79.78,50.24 r90 top locked
U16 "DAC8760IPWP" PWP24-DIE84X166 62.03,50.24 r90 top locked
U17 "TPS7A4700RGW" RGW0020A 35.425,41.14 r180 top
U18 "TPS7A3001DGNR" MSOP8(DGN) 13.675,28.08 r90 top
U19 "TPS7A1650DGNR" DGN_8P 23.805,33.38 r90 top
U20 "LM5017MRE/NOPB" DDA0008B_N 16.89,63.86 r270 top
U21 "LM5069MM-2/NOPB" MUB10A_N 40.114,90.76 r90 top
U22 "AS1117-3.3V" SOT-223 35.54,51.67 r90 top
U23 "TPS5430" SO-G8 38.03,72.24 r90 top

## Footprints (in the part's own frame and the unit in brackets; to place one, negate y for a bottom-side part, rotate by r counter-clockwise, add the part's x,y. Pads: shape width x height; smd on the part's side, far side on the other; paste and mask are expansions set on the pad)
123 [mm]
  rect 2.6x2.6 hole 1.4: 1(0,0)
  round 2.6 hole 1.4: 2(11,0) 3(0,-7.62) 4(11,-7.62) 5(0,-15.24) 6(11,-15.24) 7(0,-22.86) 8(11,-22.86) 9(0,-30.48) 10(11,-30.48) 11(0,-38.1) 12(11,-38.1) 13(0,-45.72) 14(11,-45.72) 15(0,-53.34) 16(11,-53.34) 17(0,-60.96) 18(11,-60.96) 19(0,-68.58) 20(11,-68.58) 21(0,-76.2) 22(11,-76.2) 23(0,-83.82) 24(11,-83.82) 25(0,-91.44) 26(11,-91.44) 27(0,-99.06) 28(11,-99.06) 29(0,-106.68) 30(11,-106.68) 31(0,-114.3) 32(11,-114.3)
  silkscreen extent -10.4,-118.11 14,3.81
0805 [mil]
  rect 60x50 smd: 1(0,0) 2(90,0)
  silkscreen extent -50,-45 140,45
0805_cap [mm]
  rect 1.524x1.27 smd: 1(-0.31,-0.11) 2(1.976,-0.11)
  silkscreen extent -1.51,-1.26 3.19,0.99
0805_CAP [mm]
  rect 1.524x1.27 smd: 1(-0.31,-0.11) 2(1.976,-0.11)
  silkscreen extent -1.51,-1.26 3.19,0.99
0805_HV [mil] "0805 with 30mil clearance between pads"
  rect 50x63 smd: 1(-40,0) 2(40,0)
  silkscreen extent -74,-40 74,40, body extent -43,-29 43,29, height 43
0805LED [mm]
  rect 1.4x1.27 smd: 1(-1.143,0.013) 2(1.067,0.013)
  silkscreen extent -1.94,-0.88 1.88,2.67
1206 [mm] "1206 from SM-752 data"
  rect 1.3x1.85 smd: 1(-1.45,0) 2(1.45,0)
  silkscreen extent -2.4,-1.21 2.4,1.21, body extent -1.7,-0.9 1.7,0.9, height 1.35
1210 [mil]
  rect 50x110 smd mask+2: 1(60,0) 2(-60,0)
1812 [mm]
  rect 1.6x3.4 smd: 1(-2,0) 2(2,0)
  silkscreen extent -0.8,-1.6 0.8,1.6, body extent -2.4,-1.7 2.4,1.7, height 1.35
3528cap [mil]
  rect 60x100 smd: 1(-1,1) 2(149,1)
  silkscreen extent -61,-69 199,71
6032-28 [mm] "Medium Density IPC based on Vishay Sprague 293D datasheet."
  rect 2.55x2.3 smd: 1(-2.375,0) 2(2.375,0)
  silkscreen extent -3.96,-1.75 3.2,1.82, body extent -3.15,-1.75 3.15,1.75, height 2.8
7343-31 [mm] "Medium Density based on Kemet T495 dimensions"
  rect 2.55x2.45 smd: 1(-3.025,0) 2(3.025,0)
  silkscreen extent -4.56,-2.3 3.8,2.3, body extent -3.8,-2.3 3.8,2.3, height 3.1
7343-43 [mm] "Medium density IPC based on Kemet T495 series"
  rect 2.55x2.45 smd: 1(-3.025,0) 2(3.025,0)
  silkscreen extent -4.56,-2.3 3.8,2.3, body extent -3.8,-2.3 3.8,2.3, height 4.3
C0805 [mil]
  rect 60x50 smd: 1(-100,0) 2(-10,0)
  silkscreen extent -150,-45 40,45
CONN_1734348-1 [mm] "Connector; D Subminiature 9 Position; Right Angle"
  rect 1.8x1.8 hole 1.2: 1(-5.54,-10.92)
  round 1.8 hole 1.2: 2(-2.77,-10.92) 3(0,-10.92) 4(2.77,-10.92) 5(5.54,-10.92) 6(-4.155,-8.08) 7(-1.385,-8.08) 8(1.385,-8.08) 9(4.155,-8.08)
  round 4.76 hole 3.18: 10(-12.495,-9.5) 11(12.495,-9.5)
  silkscreen extent -15.4,-12.4 15.4,6, body extent -15.4,-12.4 15.4,6.02, height 12.52
CZ3.0/6.5 [mm]
  rect 1.6x1.6 hole 0.8: 1(1.524,0)
  round 1.6 hole 0.8: 2(-1.524,0)
  silkscreen extent -3.25,-3.25 3.25,3.25
DBV5 [mil]
  rect 58x22 smd: 1(-47,37.4) 2(-47,0) 3(-47,-37.4) 4(47,-37.4) 5(47,37.4)
  silkscreen extent -12,-60 34,60
DDA0008B_N [mm] "SOIC, 8-Leads, Body 4.9x3.9mm, Pitch 1.27mm, Exposed Pad, IPC Medium Density"
  oval 2x0.6 smd: 1(-2.5,1.905) 2(-2.5,0.635) 3(-2.5,-0.635) 4(-2.5,-1.905) 5(2.5,-1.905) 6(2.5,-0.635) 7(2.5,0.635) 8(2.5,1.905)
  rect 2.41x3.1 smd: 9(0,0)
  silkscreen extent -2.62,-2.5 1.1,2.88, body extent -2,-2.5 2,2.5, height 1.68
DGN_8P [mil]
  rect 40x17 smd: 1(-82.1,40) 2(-82.1,14.4) 3(-82.1,-11.2) 4(-82.1,-36.8) 5(82.9,-36.9) 6(82.9,-11.3) 7(82.9,14.3) 8(82.9,40)
  rect 80x80 smd: 9(0.2,1.4)
  silkscreen extent -150,49 -124,74
DW18 [mil]
  rect 91x22 smd: 1(-178,200) 2(-178,150) 3(-178,100) 4(-178,50) 5(-178,0) 6(-178,-50) 7(-178,-100) 8(-178,-150) 9(-178,-200) 10(178,-200) 11(178,-150) 12(178,-100) 13(178,-50) 14(178,0) 15(178,50) 16(178,100) 17(178,150) 18(178,200)
  silkscreen extent -235,-232 150,245
FB0603 [mm]
  rect 0.95x1 smd: 1(-0.75,0) 2(0.75,0)
  silkscreen extent -0.8,-0.7 0.8,0.7
GSDS104C2 [mm]
  rect 3.6x2.8 smd: 1(0,4) 2(0,-4)
  silkscreen extent -5.2,-4.6 5.21,4.6
HDR2X3 [mm] "Connector; Header; 3x2 Position"
  rect 1.5x1.5 hole 0.9: 1(0,0)
  round 1.5 hole 0.9: 2(0,2.54) 3(2.54,0) 4(2.54,2.54) 5(5.08,0) 6(5.08,2.54)
  silkscreen extent -1.27,-1.27 6.35,3.81
HDR2X23 [mm] "Connector; Header; 23x2 Position"
  rect 1.5x1.5 hole 0.9: 1(0,0)
  round 1.5 hole 0.9: 2(0,2.54) 3(2.54,0) 4(2.54,2.54) 5(5.08,0) 6(5.08,2.54) 7(7.62,0) 8(7.62,2.54) 9(10.16,0) 10(10.16,2.54) 11(12.7,0) 12(12.7,2.54) 13(15.24,0) 14(15.24,2.54) 15(17.78,0) 16(17.78,2.54) 17(20.32,0) 18(20.32,2.54) 19(22.86,0) 20(22.86,2.54) 21(25.4,0) 22(25.4,2.54) 23(27.94,0) 24(27.94,2.54) 25(30.48,0) 26(30.48,2.54) 27(33.02,0) 28(33.02,2.54) 29(35.56,0) 30(35.56,2.54) 31(38.1,0) 32(38.1,2.54) 33(40.64,0) 34(40.64,2.54) 35(43.18,0) 36(43.18,2.54) 37(45.72,0) 38(45.72,2.54) 39(48.26,0) 40(48.26,2.54) 41(50.8,0) 42(50.8,2.54) 43(53.34,0) 44(53.34,2.54) 45(55.88,0) 46(55.88,2.54)
  silkscreen extent -1.27,-1.27 57.28,3.81
ISO1050DW [mm] "IC TXRX ISOLATED CAN 5V 16SOIC"
  rect 0.6x2 smd mask+0.07: 1(-4.445,-4.7) 2(-3.175,-4.7) 3(-1.905,-4.7) 4(-0.635,-4.7) 5(0.635,-4.7) 6(1.905,-4.7) 7(3.175,-4.7) 8(4.445,-4.7) 9(4.445,4.7) 10(3.175,4.7) 11(1.905,4.7) 12(0.635,4.7) 13(-0.635,4.7) 14(-1.905,4.7) 15(-3.175,4.7) 16(-4.445,4.7)
  silkscreen extent -5.59,-4.83 5.35,3.9, body extent -5.25,-3.8 5.25,3.8, height 2.66
Keystone5002 [mm] "For Keystone 500x miniature loop terminals"
  round 1 hole 0.5: 1(0,0)
  silkscreen extent -0.8,-0.8 0.8,0.8
M16B_N [mm] "SOIC, 16-Leads, Body 10.3x7.5mm, Pitch 1.27mm, IPC Medium Density"
  oval 2.3x0.6 smd: 1(-4.55,4.445) 2(-4.55,3.175) 3(-4.55,1.905) 4(-4.55,0.635) 5(-4.55,-0.635) 6(-4.55,-1.905) 7(-4.55,-3.175) 8(-4.55,-4.445) 9(4.55,-4.445) 10(4.55,-3.175) 11(4.55,-1.905) 12(4.55,-0.635) 13(4.55,0.635) 14(4.55,1.905) 15(4.55,3.175) 16(4.55,4.445)
  silkscreen extent -4.67,-5.25 3,5.42, body extent -3.75,-5.25 3.75,5.25, height 2.65
MPU6050-MODULE [mm]
  round 1.5 hole 0.9: 1(7.69,-2.61) 2(10.23,-2.61) 3(12.77,-2.61) 4(15.31,-2.61)
  Keep-Out Layer circle w0.254: c2.61,-2.61 r1.5
  Keep-Out Layer circle w0.254: c20.39,-2.61 r1.5
  Keep-Out Layer circle w0.254: c2.61,-20.39 r1.5
  Keep-Out Layer circle w0.254: c20.39,-20.39 r1.5
  silkscreen extent 0,-23 23,0
MSOP8(DGN) [mil]
  rect 50x15 smd: 1(-77,38) 2(-77,12.4) 3(-77,-13.2) 4(-77,-38.8) 5(76.6,-38.8) 6(76.6,-13.2) 7(76.6,12.4) 8(76.6,38)
  rect 60x75 smd: 9(0,-0.8)
  silkscreen extent -102,79 -76,104
MUB10A_N [mm] "TSSOP, 10-Leads, Body 3x3mm, Pitch 0.5mm, IPC Medium Density"
  oval 1.7x0.3 smd: 1(-2.05,1) 2(-2.05,0.5) 3(-2.05,0) 4(-2.05,-0.5) 5(-2.05,-1) 6(2.05,-1) 7(2.05,-0.5) 8(2.05,0) 9(2.05,0.5) 10(2.05,1)
  silkscreen extent -2.17,-1.6 0.8,1.82, body extent -1.6,-1.6 1.6,1.6, height 1.09
NSO16_N [mm]
  oval 0.6x2.2 smd: 1(-3.957,-2.43) 2(-2.687,-2.43) 3(-1.417,-2.43) 4(-0.147,-2.43) 5(1.123,-2.43) 6(2.393,-2.43) 7(3.663,-2.43) 8(4.933,-2.43) 9(4.933,2.37) 10(3.663,2.37) 11(2.393,2.37) 12(1.123,2.37) 13(-0.147,2.37) 14(-1.417,2.37) 15(-2.687,2.37) 16(-3.957,2.37)
  silkscreen extent -4.93,-2.56 5.49,0.87, body extent -4.46,-1.98 5.44,1.92, height 1.75
NUP2105LT1G [mm] "IC CAN BUS PROTECTOR DUAL SOT23"
  rect 0.8x0.9 smd mask+0.05: 1(-0.95,-1) 2(0.95,-1) 3(0,1)
  silkscreen extent -1.84,-1.33 1.62,0.8, body extent -1.52,-0.7 1.52,0.7, height 1.12
PA1a-24v [mm]
  round 2 hole 1.2: 1(19.39,-3.82) 2(14.31,-3.82)
  round 2 hole 1: 3(4.15,-3.82) 4(1.61,-3.82)
  silkscreen extent 0,-5.08 21.08,0
powerDI123 [mm] "Diodes Inc recommended land pattern, document number DS30628 Rev. 6-2"
  rect 2.2x1.4 smd: 1(-1.275,0)
  rect 0.9x1.4 smd: 2(1.275,0)
  silkscreen extent -3.1,-1.09 1.76,1.09, body extent -2.38,-0.97 1.52,0.96, height 1
PW24 [mil]
  rect 66x14 smd: 1(-111,140.75) 2(-111,115.16) 3(-111,89.57) 4(-111,63.98) 5(-111,38.39) 6(-111,12.8) 7(-111,-12.8) 8(-111,-38.39) 9(-111,-63.98) 10(-111,-89.57) 11(-111,-115.16) 12(-111,-140.75) 13(111,-140.75) 14(111,-115.16) 15(111,-89.57) 16(111,-63.98) 17(111,-38.39) 18(111,-12.8) 19(111,12.8) 20(111,38.39) 21(111,63.98) 22(111,89.57) 23(111,115.16) 24(111,140.75)
  silkscreen extent -155,-156 67,180
PWP24-DIE84X166 [mil]
  rect 70x15 smd: 1(-109.3,140.5) 2(-109.3,114.9) 3(-109.3,89.3) 4(-109.3,63.7) 5(-109.3,38.1) 6(-109.3,12.5) 7(-109.3,-13.1) 8(-109.3,-38.7) 9(-109.3,-64.3) 10(-109.3,-89.9) 11(-109.3,-115.5) 12(-109.3,-141.1) 13(109.7,-141.2) 14(109.7,-115.6) 15(109.7,-90) 16(109.7,-64.4) 17(109.7,-38.8) 18(109.7,-13.2) 19(109.7,12.4) 20(109.7,38) 21(109.7,63.6) 22(109.7,89.2) 23(109.7,114.8) 24(109.7,140.5)
  rect 84x166 smd: 25(0,-0.1)
  silkscreen extent -196,144 -156,184
PWP28_6P17X2P4 [mil]
  rect 50x12 smd: 1(-117,166.34) 2(-117,140.75) 3(-117,115.16) 4(-117,89.57) 5(-117,63.98) 6(-117,38.39) 7(-117,12.8) 8(-117,-12.8) 9(-117,-38.39) 10(-117,-63.98) 11(-117,-89.57) 12(-117,-115.16) 13(-117,-140.75) 14(-117,-166.34) 15(117,-166.34) 16(117,-140.75) 17(117,-115.16) 18(117,-89.57) 19(117,-63.98) 20(117,-38.39) 21(117,-12.8) 22(117,12.8) 23(117,38.39) 24(117,63.98) 25(117,89.57) 26(117,115.16) 27(117,140.75) 28(117,166.34)
  rect 94.49x242.91 smd: 29(0,0)
  silkscreen extent -145,-193 88,212
R0805 [mil]
  rect 60x50 smd: 1(-100,0) 2(-10,0)
  silkscreen extent -150,-45 40,45
RGW0020A [mm] "QFN, 20-Leads, Body 5x5mm, Pitch 0.65mm, Thermal Pad 3.15x3.15mm, TI Recommended"
  oval 0.75x0.3 smd mask+0.07: 1(-2.325,1.3) 2(-2.325,0.65) 3(-2.325,0) 4(-2.325,-0.65) 5(-2.325,-1.3) 11(2.325,-1.3) 12(2.325,-0.65) 13(2.325,0) 14(2.325,0.65) 15(2.325,1.3)
  oval 0.3x0.75 smd mask+0.07: 6(-1.3,-2.325) 7(-0.65,-2.325) 8(0,-2.325) 9(0.65,-2.325) 10(1.3,-2.325) 16(1.3,2.325) 17(0.65,2.325) 18(0,2.325) 19(-0.65,2.325) 20(-1.3,2.325)
  rect 3.15x3.15 smd paste-1.575 mask+0.07: 21(0,0)
  silkscreen extent -2.73,1.88 -1.88,2.73, body extent -2.58,-2.57 2.57,2.58, height 1.01
SIP-6B [mil]
  rect 70x70 hole 35: 1(0,0)
  round 70 hole 35: 2(100,0) 3(200,0) 4(300,0) 5(400,0) 6(500,0)
  silkscreen extent -90,-100 590,130
SM_RADIAL_E [mm] "8 x 6.2mm:  Panasonic E"
  rect 4x1.6 smd: 1(-3.1,0) 2(3.1,0)
  silkscreen extent -4.25,-4.25 4.25,4.25, body extent -4.26,-4.26 4.26,4.26, height 6.5
SMB#1 [mm] "DO-214-AA/SMB; 2 C-Bend Leads; Body 5.3 x 3.6 mm, inc. leads (LxW)"
  rect 2.3x2.3 smd: 1(-2.25,0) 2(2.25,0)
  silkscreen extent -3.8,-1.55 4.1,1.55
SMB#2 [mm] "Molded Diode, 2-Leads, Body 5.4x3.6mm, IPC Medium Density, based on OnSemi component dimensions"
  rect 2.159x2.743 smd: 1(-2.21,0) 2(2.21,0)
  silkscreen extent -3.94,-2.08 3.18,2.08, body extent -2.7,-1.8 2.7,1.8, height 2.32
SO-G8 [mm]
  rect 0.6x1.8 smd: 1(-1.916,-2.7) 2(-0.646,-2.7) 3(0.624,-2.7) 4(1.894,-2.7) 5(1.894,2.7) 6(0.624,2.7) 7(-0.646,2.7) 8(-1.916,2.7)
  silkscreen extent -2.51,-1.52 2.49,1.52
SOD-123 [mm] "On Semi recommended land pattern"
  rect 0.915x1.22 smd: 1(-1.637,0) 2(1.637,0)
  silkscreen extent -2.75,-1.17 2.03,1.17, body extent -1.93,-0.9 1.93,0.9, height 1.35
SOD-123F [mm] "NXP recommended land pattern"
  rect 1.2x1.2 smd: 1(-1.4,0) 2(1.4,0)
  silkscreen extent -2.64,-1.12 2.01,1.12, body extent -1.8,-0.85 1.8,0.85, height 1.2
sod-323 [mm] "NXP recommended land pattern"
  rect 0.6x0.6 smd paste-0.05: 1(-1.1,0) 2(1.1,0)
  silkscreen extent -2.06,-0.86 1.53,0.86, body extent -1.3,-0.67 1.3,0.68, height 1.1
SOD-523 [mm] "NXP Semiconductor recommended land pattern, nominal STEP model"
  rect 0.8x0.6 smd: 1(-0.55,0) 2(0.55,0)
  silkscreen extent -1.6,-0.64 1.2,0.63, body extent -0.8,-0.4 0.8,0.4, height 0.72
Sot23-3 [mm]
  rect 1x1.3 smd: 1(0,0) 2(1.9,0) 3(0.95,2.1)
  silkscreen extent -0.35,0.87 2.25,2.35
SOT-143 [mm]
  rect 0.85x1.2 smd: 1(0,-0.2)
  rect 0.85x0.85 smd: 2(0,-1.9) 3(1.9,-1.9) 4(1.9,0)
  silkscreen extent -1.1,-2.85 2.8,1.3, body extent -0.26,-2.41 2.16,0.51, height 1
SOT-223 [mil]
  rect 50x100 smd: 1(-90.5,-234) 3(90.5,-234)
  oval 160x220 smd: 2(0,1)
  rect 50x200 smd: 2(0,-184)
  silkscreen extent -130,-164 130,-19
STM32W108-3 [mm]
  rect 0.7x3 smd: 1(16.51,21.074) 2(15.24,21.074) 3(13.97,21.074) 4(12.7,21.074) 5(11.43,21.074) 6(10.16,21.074) 7(8.89,21.074) 8(7.62,21.074) 9(6.35,21.074) 10(5.08,21.074) 11(3.81,21.074) 22(3.81,-0.627) 23(5.08,-0.627) 24(6.35,-0.627) 25(7.62,-0.627) 26(8.89,-0.627) 27(10.16,-0.627) 28(11.43,-0.627) 29(12.7,-0.627) 30(13.97,-0.627) 31(15.24,-0.627) 32(16.51,-0.627)
  rect 3x0.7 smd: 12(-0.627,16.002) 13(-0.627,14.732) 14(-0.627,13.462) 15(-0.627,12.192) 16(-0.627,10.922) 17(-0.627,9.652) 18(-0.627,8.382) 19(-0.627,7.112) 20(-0.627,5.842) 21(-0.627,4.572)
  silkscreen extent 0,0 28.5,20.57
TP1_PD40_D0.5_S50 [mil]
  round 40 hole 20: 1(0,0)
  silkscreen extent -25,-25 25,25
TP-040_RND [mil]
  round 70 / inner round 62 / far side round 62 hole 40: 1(0,0)
TRANS_NexFET_Q5A [mm] "TI recommended land pattern (nominal) M0139-01"
  rect 0.75x0.675 smd paste-0.1 mask+0.051: 1(-2.776,1.917) 2(-2.776,0.639) 3(-2.776,-0.639) 4(-2.776,-1.917)
  rect 0.655x0.675 smd paste-0.1 mask+0.051: 5(2.776,-1.917) 6(2.776,-0.639) 7(2.776,0.639) 8(2.776,1.917)
  rect 4.295x4.51 smd paste-2.2 mask+0.051: 9(0.301,0)
  silkscreen extent -3.4,-2.8 3.4,2.8, body extent -3.05,-2.5 3.05,2.5, height 1.11
"UART - Male" [mil] "带9根插针型"
  oct 62x62 hole 35: 1(218.39,-209.25)
  rect 62x62 hole 35: 2(109.22,-209.25) 3(0.05,-209.25) 4(-109.11,-209.25) 5(-218.28,-209.25) 6(163.39,-109.25) 7(54.22,-109.25) 8(-54.95,-109.25) 9(-164.11,-109.25)
  rect 196.67x196.67 hole 118.33: 10(-492.45,-159.25) 11(491.72,-159.25)
  silkscreen extent -617,-276 617,516
WURTH_750313995 [mm] "WURTH"
  rect 1.17x1.88 smd: 1(-4.96,8.18) 2(-2.48,8.18) 3(0,8.18) 4(2.48,8.18) 5(4.96,8.18) 6(4.96,-8.18) 7(2.48,-8.18) 8(0,-8.18) 9(-2.48,-8.18) 10(-4.96,-8.18)
  silkscreen extent -6.7,-7.5 6.7,8.5, body extent -6.73,-8.9 6.73,8.9, height 12.7

## Part data
C1 C2 C3 C4 C5 C6 C7 C8 C9 C10 C11 C12 C13 C14 C15: "Capacitor"
C16 C17: "CAP, CERM, 0.01uF, 16V, +/-10%, X7R, 0402"
C18 C20: "CAP, CERM, 68pF, 50V, +/-5%, C0G/NP0, 0603"
C19: "CAP, CERM, 4700pF, 25V, +/-5%, C0G/NP0, 0603"
C21: "CAP, CERM, 1000pF, 2000V, +/-10%, X7R, 1812"
C22 C23 C24 C25 C26 C27 C28 C89 C90 C91 C94: library part Cap, "Capacitor"
C29 C30 C42 C43 C58: "CAP, TA, 4.7uF, 35V, +/-10%, 1.9 ohm, SMD"
C31 C32 C33 C34 C35 C36 C38 C39 C41 C44 C45 C46 C47 C48 C49 C50 C52 C53 C55 C57 C61 C64 C66 C72 C74: "CAP, CERM, 0.1uF, 50V, +/-10%, X7R, 0603"
C37 C51: "CAP, CERM, 2200pF, 50V, +/-5%, C0G/NP0, 0603"
C40 C54: "CAP, CERM, 0.022uF, 50V, +/-10%, X7R, 0603"
C56 C63 C71: "CAP, CERM, 4.7uF, 50V, +/-10%, X5R, 0805"
C59: "CAP, TA, 22uF, 35V, +/-10%, 0.6 ohm, SMD"
C60 C80: "CAP, CERM, 1uF, 25V, +/-10%, X7R, 0603"
C62 C68 C75 C77: "CAP, CERM, 0.01uF, 100V, +/-5%, X7R, 0603"
C65 C67 C69 C70: "CAP, TA, 10uF, 35V, +/-10%, 1.6 ohm, SMD"
C73 C78 C87: "CAP, CERM, 1000pF, 100V, +/-5%, X7R, 0603"
C76 C79 C84: "CAP, CERM, 2.2uF, 25V, +/-10%, X5R, 0805"
C81: "CAP, AL, 22uF, 50V, +/-20%, 0.88 ohm, SMD"
C82 C86: "CAP, CERM, 2.2uF, 100V, +/-10%, X7R, 1210"
C83: "CAP, CERM, 0.47uF, 100V, +/-10%, X7R, 1206"
C85: "CAP, CERM, 1000pF, 2KV 10% X7R 1206"
C88: "CAP, CERM, 0.47uF, 50V, 10%, X5R, 0603"
C92 C93: library part "Cap Pol1", "Polarized Capacitor (Radial)"
C95 C96: library part C
CA1 CA2: library part ECAP
D1 D2: library part "D Schottky", "Schottky Diode"
D3 D4 D5 D6 D7 D8 D9 D10 D11 D12 D13 D14 D15 D16 D17 D18 D19 D20 D21 D22 D23 D24 D25 D26 D27 D28 D29 D30 D31 D32 D33 D34 D35 D36 D37 D38 D39 D40 D41 D42 D43 D44 D45 D46 D47 D48 D49 D50: "Typical BLUE SiC LED"
D51: library part LED3, "Typical BLUE SiC LED"
D52 D55: "IC TVS ARRAY 2-LINE 70V SOT-143"
D53 D54 D56 D57: library part SMAJ15CA, "DIODE TVS ARRAY 15V SOD323"
D58 D60: "Diode, Zener, 18V, 1W, SOD-123"
D59 D61 D62: "LED SmartLED Green 570NM"
D63 D66: "Diode, Schottky, 200V, 1A, PowerDI123"
D64: "Diode, Schottky, 60V, 1A, SOD-123F"
D65: "Diode, Schottky, 45V, 0.1A, SOD-523"
D67: library part "Diode 1N5408", "3 Amp Medium Power Silicon Rectifier Diode"
FB1 FB2: library part Ferrite_Bead, "BEAD FERRITE 500 OHM 3.0A 3216"
ISO1: library part ISO7241, "ISOLATOR DGTL 25MBPS 4CH 16SOIC"
J1: "Conn D-SUB RCPT R/A 9POS GOLD/FL, TH"
J2: "9针串口，插针型，公头"
K1 K2 K3 K4 K5 K6 K7 K8 K9 K10 K11 K12 K13 K14 K15 K16: "Single-Pole Single-Throw Relay"
L1 L2 L3: library part MMZ1608B102C, "FERRITE CHIP 1000 OHM 300MA 0603"
L4: library part IND_ELJEA_SERIES, "Inductor, Chip, ?0%"
L5: library part Inductor, "Inductor"
P1 P2: "Header, 23-Pin, Dual row"
P3 P4: "Header, 16-Pin, Dual row"
P5 P7: "Header, 3-Pin, Dual row"
P6: library part "Header 6", "Header, 6-Pin"
Q1 Q2 Q3 Q4 Q5 Q6 Q7 Q8 Q9 Q10 Q11 Q12 Q13 Q14 Q15 Q16 Q17 Q18 Q19 Q20 Q21 Q22 Q23 Q24 Q25 Q26 Q27 Q28 Q29 Q30 Q31 Q32: library part PNP
Q33: "MOSFET, N-CH, 60V, 50A, SON 5x6mm"
R1 R2 R3 R4 R5 R6 R7 R8 R9 R10 R11 R12 R13 R14 R15 R16 R17 R18 R19 R20 R21 R22 R23 R24 R25 R26 R27 R28 R29 R30 R31 R32 R33 R34 R35 R36 R37 R38 R39 R40 R41 R42 R43 R44 R45 R46 R47 R48 R49 R50 R51 R52 R53 R54 R55 R56 R57 R58 R59 R60 R61 R62 R63 R64 R65 R66 R67 R68 R69 R70 R71 R72 R73 R74 R75 R76 R77 R78 R79 R80 R81 R82 R83 R84 R85 R86 R87 R88 R89 R90 R91 R92 R93 R94 R95 R96 R97 R98 R99 R100 R101 R102 R103 R104 R105 R106 R107 R108 R109 R110 R111 R112 R113 R114 R115 R116 R117 R118 R119 R120 R123 R124 R127 R131: "Resistor"
R121 R122: "RES, 60.4 ohm, 1%, 0.125W, 0805"
R125 R126: library part Res3, "Resistor"
R128: library part RES, "R"
R129 R130 R134 R135: "RES, 15 ohm, 5%, 0.1W, 0603"
R132 R136: "RES, 15.0k ohm, 0.1%, 0.1W, 0603"
R133 R137: library part CRA2512-FZ-R080ELF, "RES 15 OHM 1W 5% 2512"
R138 R139: "RES, 4.7k ohm, 5%, 0.1W, 0603"
R140: "RES, 110k ohm, 1%, 0.063W, 0402"
R141: library part CRCW04029K31FKED, "RES, 9.42k ohm, 1%, 0.063W, 0402"
R142: "RES, 1.2k ohm, 5%, 0.063W, 0402"
R143: "RES, 20k ohm, 5%, 0.1W, 0603"
R144: "RES, 113k ohm, 1%, 0.1W, 0603"
R145: "RES, 340k ohm, 1%, 0.1W, 0603"
R146: "RES, 127k ohm, 1%, 0.1W, 0603"
R147: "RES, 20.0k ohm, 1%, 0.1W, 0603"
R148: "RES, 10k ohm, 5%, 0.1W, 0603"
R149: "RES, 0.02 ohm, 1%, 1W, 1206"
R150: "RES, 95.3k ohm, 1%, 0.1W, 0603"
R151: "RES, 47.5k ohm, 1%, 0.1W, 0603"
R152: "RES, 10.0k ohm, 1%, 0.1W, 0603"
R153: "RES, 7.50k ohm, 1%, 0.1W, 0603"
R154: "RES, 15.8k ohm, 1%, 0.1W, 0603"
R155: "RES, 56.0k ohm, 0.1%, 0.1W, 0603"
R156 R157: library part Res2, "Resistor"
T1: library part 750313995, "Transformer, 50uH, SMT"
TP1 TP2: "Test Point, Miniature, White, TH"
TP3 TP4 TP5 TP6 TP7 TP8 TP9 TP10: "Test Point 40mil pad 20mil drill"
TP11 TP12 TP13: "Test Point, O.040 Hole"
U1: "ISOLATOR DGTL 25MBPS 4CH 16SOIC"
U2 U3 U4 U5 U6 U7 U8 U10: "Imported"
U11: "IC TXRX ISOLATED CAN 5V 16SOIC"
U12: "IC CAN BUS PROTECTOR DUAL SOT23"
U13: library part MAX232, "+5V Powered, Multi-Channel RS-232 Driver/Receiver"
U15 U16: library part DAC8760IPWP_1, "1-Channel, 16-Bit, Programmable Current/Voltage Output DAC for 4-20mA Current Loop Applications"
U17: "36-V, 1-A, 4.17-礦RMS, RF LDO Voltage Regulator, RGW0020A"
U18: "-36V, -200mA, Ultralow-Noise, Negative Linear Regulator"
U19: library part TPS7A16XXDGN, "IC, 60-V, 6-A IQ, 100-mA, LDO Voltage Regulator with Enable and Power-Good Functions"
U20: "100V, 600mA Constant On-Time Synchronous Buck Regulator, DDA0008B"
U21: "Positive High Voltage Hot Swap / Inrush Current Controller with Power Limiting, 10-pin MSOP, Pb-Free"
U22: library part AS1117

## Free pads (board coordinates)
  round 1.2 hole 0.8: 0(87.344,68.053)

## Via types
v1: diameter 0.6, hole 0.4, Top Layer to Bottom Layer, 427 vias
v2: diameter 0.5, hole 0.2, Top Layer to Bottom Layer, 9 vias
v3: diameter 0.66, hole 0.33, Top Layer to Bottom Layer, 4 vias

## Nets (pads, with @x,y where several pads share a name; then routed paths per layer and width w, separated by ;. In a path a pad name is that pad's centre, name@x,y a point inside that pad or via, vN(x,y) a via of type N, cw(c..) or ccw(c..) an arc to the next point about the centre after c; other vN are vias at no path point)
+5.3V_ISO: C69.1 C72.2 C79.1 D64.1 TP7.1 U19.5 U19.8 | length 24.4
  Top Layer w0.4: C79.1@21.68,38.39 21.68,38.34 22.57,37.45 ; C79.1@22.162,38.468 ccw(c23.151,38.29) 22.441,37.579 ; U19.8@22.789,35.486 22.57,35.705 22.57,37.45 ; U19.5@24.742,35.486 24.742,37.088 24.38,37.45 22.57,37.45
  Top Layer w0.8: C69.1@17.935,39.05 ccw(c17.101,39.884) 18.28,39.884 ; C69.1@18.27,38.45 18.28,38.46 TP7.1@18.28,40.85 ; TP7.1@18.28,40.777 ccw(c20.722,40.777) 18.995,39.05 ccw(c19.817,39.872) 19.817,38.71 ; C69.1@18.51,38.69 18.53,38.71 C79.1@21.734,38.71 21.75,38.726 D64.1@21.75,41.04 ; C69.1@18.995,37.99 cw(c20.734,36.251) 20.734,38.71
  Bottom Layer w0.8: TP7.1@18.28,40.85 18.28,38.386 C72.2@18.29,38.376
+5V_ISO: C17.1 C71.1 C74.2 L3.2 R142.1 TP8.1 U11.16 | length 279.6
  Top Layer w0.3: U11.16@211.085,57.41 v1(212.57,57.41)
  Top Layer w0.4: C71.1@32.898,31.802 cw(c31.322,30.227) 33.55,30.227 ; C71.1@33.18,32.085 cw(c32.288,31.193) 33.55,31.193 ; C71.1@33.34,32.27 33.55,32.06 L3.2@33.55,29.716 35.556,29.716 TP8.1@35.57,29.73 35.57,9.811 37.249,8.132 58.339,8.132 65.181,1.29 v1(202.346,1.29) ; L3.2@33.356,29.935 ccw(c32.886,30.405) 33.55,30.405 ccw(c34.214,30.405) L3.2@33.744,29.935 ; L3.2@33.744,29.522 cw(c34.214,29.052) 34.214,29.716 cw(c34.214,30.38) L3.2@33.744,29.91 ; 34.793,29.716 ccw(c34.793,30.507) TP8.1@35.352,29.948 ; 34.86,29.716 cw(c34.86,29.02) TP8.1@35.352,29.512
  MidLayer2 w0.4: v1(202.346,1.29) 202.346,6.362 204.819,8.835 206.045,8.835 208.256,11.046 208.256,20.721 209.719,22.184 212.579,22.184 213.796,23.401 213.796,56.184 v1(212.57,57.41)
  Bottom Layer w0.3: C17.1@211.11,57.61 211.31,57.41 v1(212.57,57.41) cw(c212.57,58.395) C17.1@211.663,58.01 ; C17.1@211.387,57.892 ccw(c212.116,58.202) 212.116,57.41 ; v1@212.464,57.304 ccw(c212.208,57.048) 212.208,57.41 ccw(c212.208,57.772) v1@212.464,57.516
  Bottom Layer w0.4: C74.2@32.969,31.644 cw(c32.553,30.737) v1@33.55,30.737 ; C74.2@33.135,32.007 cw(c32.839,31.361) 33.55,31.361 ; C74.2@33.15,32.166 35.556,32.166 R142.1@35.73,32.34 ; C74.2@33.458,31.858 cw(c34.2,31.116) 34.2,32.166 cw(c34.2,33.216) C74.2@33.458,32.474 ; v1(33.55,30.8) C74.2@33.55,32.22 ; 34.566,32.166 ccw(c34.566,33.377) R142.1@35.422,32.521 ; 34.793,32.166 cw(c34.793,31.276) R142.1@35.422,31.905